# EAGLE board braino_board (EAGLE 7.7.0)
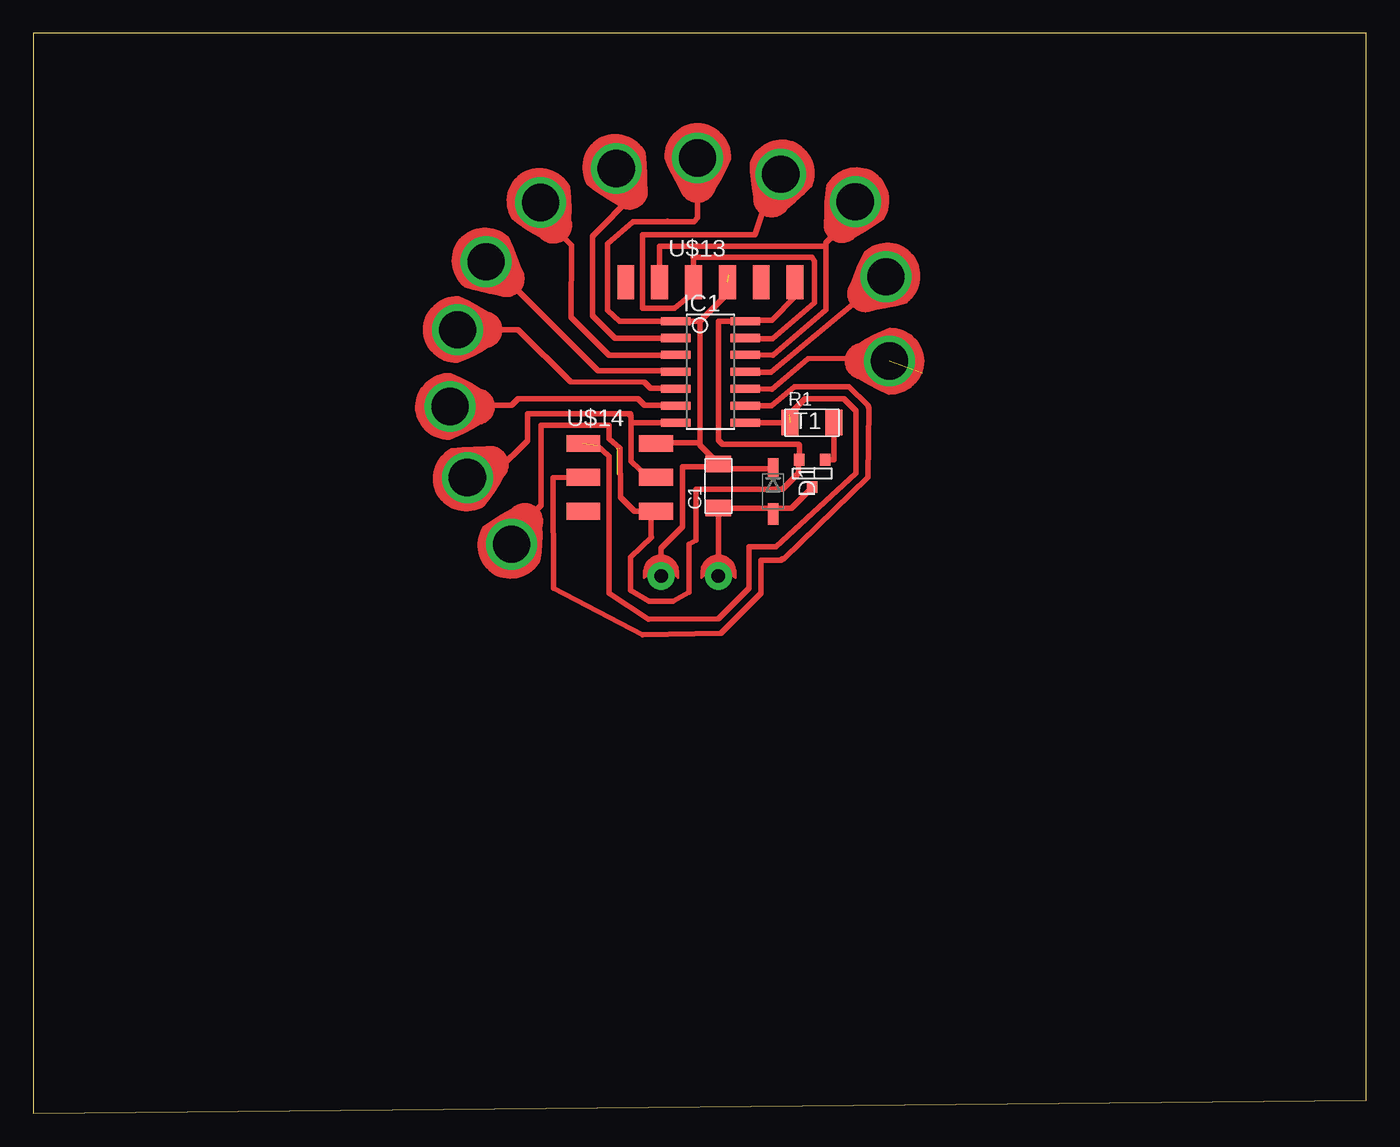
[diagram p0: board, top side]
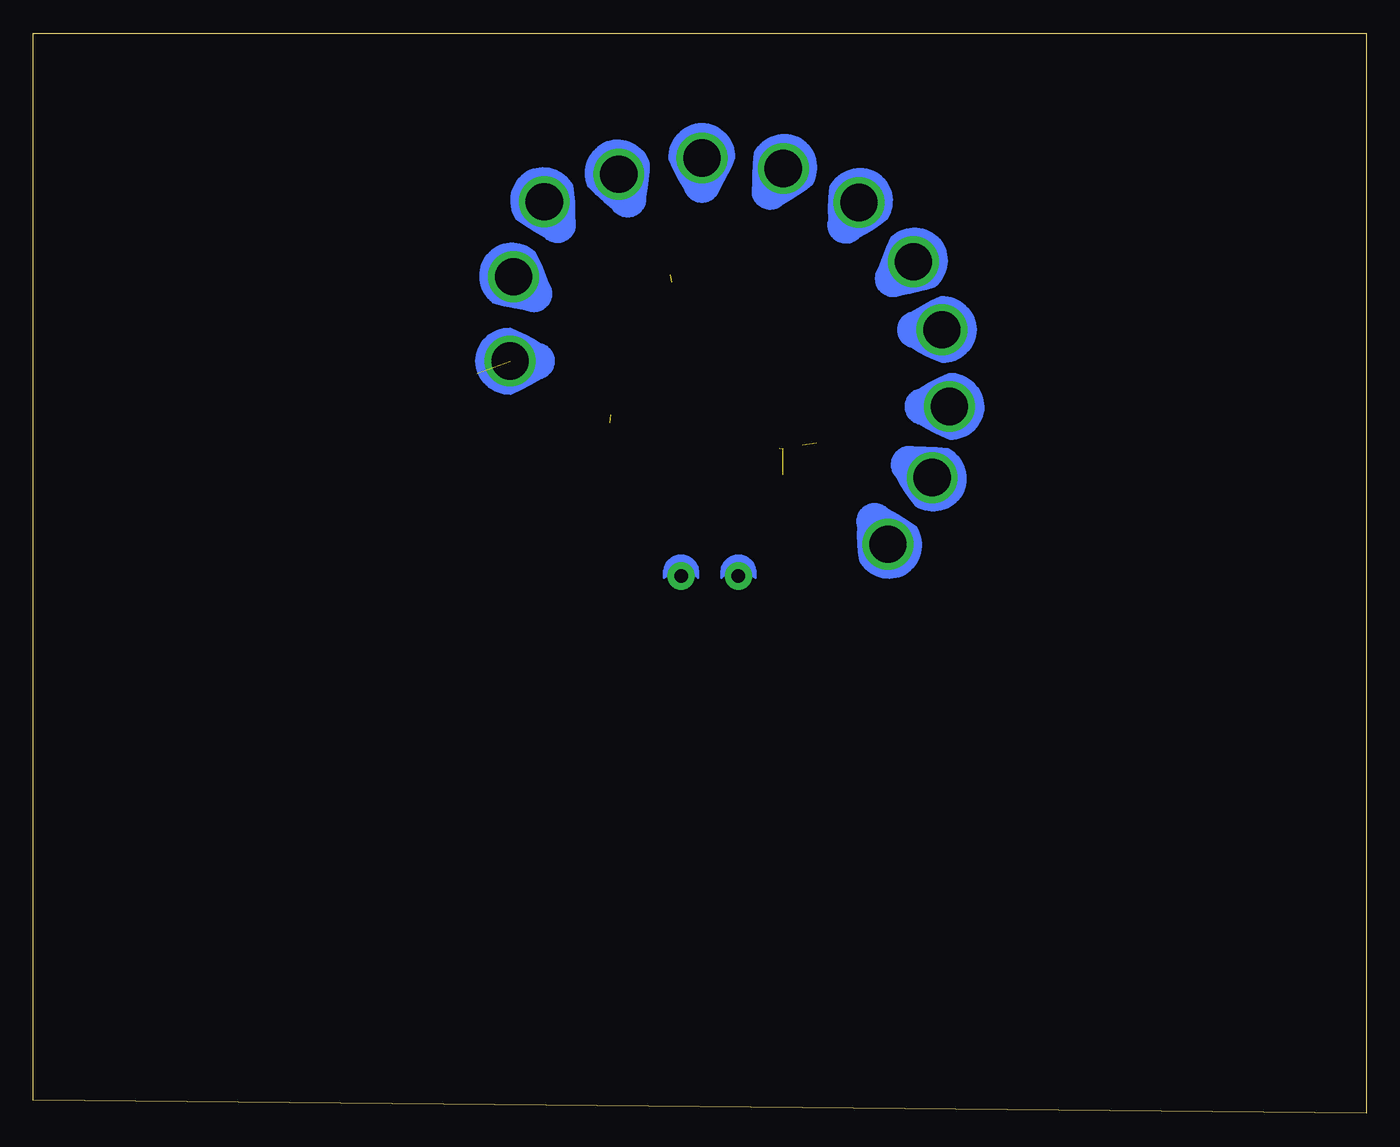
[diagram p1: board, bottom side, seen from below]

Size 100 x 81 mm. Coordinates in mm from the lower left corner, seen from the top.
Outline: 0,0 100,1 100,81 0,81 0,0
Copper layers (1*16): Top 0.035mm / dielectric 1.5mm / Bottom 0.035mm
Design rules "default *": minimum track width 16mil, minimum drill 24mil, track to track 16mil, track to pad 16mil, pad to pad 16mil, via to via 16mil, smd to smd 16mil, copper to edge 40mil, drill to drill 8mil, minimum pad ring 10mil, minimum via ring 8mil, stop-mask expansion 4mil, vias tented up to drill 0mil, thermal gap 10mil

## Footprints (pad centres in the part's own frame; a part is rotated, then mirrored left to right if it is on the bottom)
C1206FAB = smd 1.27 x 1.905: 1 -1.651,0; 2 1.651,0
SOD123 = smd 1.6 x 0.8: ANODE 1.7,0; CATHODE -1.7,0
SOIC14 = smd 0.61 x 2.21: 1 -3.81,-2.603; 2 -2.54,-2.603; 3 -1.27,-2.603; 4 0,-2.603; 5 1.27,-2.603; 6 2.54,-2.603; 7 3.81,-2.603; 8 3.81,2.603; 9 2.54,2.603; 10 1.27,2.603; 11 0,2.603; 12 -1.27,2.603; 13 -2.54,2.603; 14 -3.81,2.603
R1206FAB = smd 1.27 x 1.905: 1 -1.651,0; 2 1.651,0
SOT-23 = smd 0.787 x 0.889: 1 0.025,-1.016; 2 -0.94,1.016; 3 0.991,1.016
PETAL-LONG-2-2SIDE = drill 2.794: 1 0,0
1X06SMD = smd 2.54 x 1.27: 1 0,6.35; 2 0,3.81; 3 0,1.27; 4 0,-1.27; 5 0,-3.81; 6 0,-6.35
2X03SMD = smd 2.54 x 1.27: 1 -2.54,2.54; 2 2.92,2.54; 3 -2.54,0; 4 2.92,0; 5 -2.54,-2.54; 6 2.92,-2.54
PETAL-TINY = drill 1.016 pad 2.032: 1 0,0

## Placement (x,y rotation side)
C1  0.1µF  [C1206FAB]  51.4,47.05 90 top
D1  [SOD123]  55.51,46.65 270 top
IC1  ATTINY44-SSU  [SOIC14]  50.8,55.61 270 top
R1  1k Ω  [R1206FAB]  58.42,51.8 0 top
T1  MOSFET  [SOT-23]  58.42,47.99 0 top
U$1  SEWTAP10  [PETAL-LONG-2-2SIDE]  33.96,63.87 230 top
U$2  SEWTAP10  [PETAL-LONG-2-2SIDE]  31.84,58.77 270 top
U$3  SEWTAP10  [PETAL-LONG-2-2SIDE]  38.05,68.32 210 top
U$4  SEWTAP10  [PETAL-LONG-2-2SIDE]  43.73,70.86 210 top
U$5  SEWTAP10  [PETAL-LONG-2-2SIDE]  31.26,53.01 270 top
U$6  SEWTAP10  [PETAL-LONG-2-2SIDE]  32.57,47.68 300 top
U$9  SEWTAP10  [PETAL-LONG-2-2SIDE]  64.23,56.42 90 top
U$10  SEWTAP10  [PETAL-LONG-2-2SIDE]  63.97,62.74 130 top
U$11  SEWTAP10  [PETAL-LONG-2-2SIDE]  61.67,68.37 150 top
U$12  SEWTAP10  [PETAL-LONG-2-2SIDE]  56.08,70.43 160 top
U$13  FTDI-SMD-HEADER  [1X06SMD]  50.8,62.32 270 top
U$14  AVRISPSMD  [2X03SMD]  43.8,47.7 0 top
U$15  SEWTAP10  [PETAL-LONG-2-2SIDE]  35.88,42.68 330 top
U$16  SEWTAP10  [PETAL-LONG-2-2SIDE]  49.84,71.65 180 top
U$17  SEWTAP11  [PETAL-TINY]  47.1,40.3 0 top
U$18  SEWTAP11  [PETAL-TINY]  51.4,40.3 0 top

## Library data of the parts
C1 D1 IC1 R1 T1 U$13 U$14 = 0_fab
U$1-U$6 U$9-U$12 U$15-U$18 = LilyPad-Wearables

## Nets
GND: IC1.14 T1.2 U$13.1 U$14.6 U$15.1
MOSI: IC1.7 U$6.1 U$14.4
N$1: IC1.4 U$1.1
N$2: IC1.5 U$2.1
N$3: IC1.3 U$3.1
N$4: IC1.2 U$4.1
N$5: IC1.6 U$5.1
N$8: IC1.10 U$9.1
N$9: IC1.11 U$10.1
PA5: IC1.8 R1.1 U$14.1
RX: IC1.12 U$11.1 U$13.5
SCK: IC1.9 U$14.3
TRANS: C1.1 D1.ANODE T1.1 U$18.1
TRANSIN: R1.2 T1.3
TX: IC1.13 U$12.1 U$13.4
VCC: C1.2 D1.CATHODE IC1.1 U$13.3 U$14.2 U$16.1 U$17.1

## Tracks (layer width: path | path; a pad name or v marks a point on that pad's centre or on a via)
GND  (3 unrouted)
  Top 0.406: U$13.1 57.15,61.25 55.4,59.5 53.48,59.5 IC1.14 51.4,59.42 51.4,50.5 51.7,50.2 57.4,50.2 57.48,50.12 T1.2 57.4,48.93 57.4,48 56.2,46.8 49.7,46.8 49.7,43 49.2,42.7 49.2,39.1 48,38.4 46.2,38.4 44.81,39.24 44.79,41.71 46.37,43.21 46.36,43.21 46.36,45.16 U$14.6 45.09,45.16 44.05,46.2 44.01,49.9 43.2,50.6 43.2,51.6 38.1,51.6 38.1,45.6 36.42,43.92 36.42,43.03 36.07,42.68 U$15.1
MOSI
  Top 0.406: IC1.7 44.84,51.8 | 46.3,47.5 U$14.4 46.1,47.7 44.84,48.9 44.84,51.8 | 33.3,46.1 U$6.1 32.57,47.82 32.27,48.12 34.73,48.12 37.07,50.46 37.07,52.44 37.09,52.46 44.82,52.48 44.78,52.32 44.84,52.32 44.84,51.8
N$1
  Top 0.406: IC1.4 48.12,55.69 42.37,55.69 36.06,62 35.83,62 U$1.1 34.67,63.87
N$2
  Top 0.406: IC1.5 48.09,54.45 48.03,54.39 46.32,54.39 45.87,54.84 40.29,54.87 36.37,58.76 36.36,58.77 U$2.1
N$3
  Top 0.406: IC1.3 48.16,56.84 43.19,56.84 40.34,59.69 40.37,65.11 38.05,67.49 | 38.05,66.85 38.05,67.49 | 38.05,67.49 U$3.1
N$4
  Top 0.406: IC1.2 48.19,58.14 43.64,58.14 41.95,59.83 41.95,65.8 45.08,68.93 45.11,68.93 43.73,70.31 U$4.1
N$5
  Top 0.406: IC1.6 48.18,53.09 45.84,53.09 45.35,53.58 36.35,53.58 35.88,53.11 30.7,53.11 30.8,53.01 U$5.1
N$8  (1 unrouted)
  Top 0.406: IC1.10 55.4,54.3 58.1,56.6 63.56,56.62 U$9.1
N$9
  Top 0.406: IC1.11 53.41,55.6 55.36,55.6 U$10.1
PA5  (2 unrouted)
  Top 0.406: R1.1 IC1.8 | 56.7,52.4 57.9,53.6 60.8,53.6 61.7,52.7 61.7,48 55.7,42.5 53.7,42.5 53.7,39.4 51.4,37.1 46.17,37.07 43.2,39 43.2,49.3 42.3,50.1
RX
  Top 0.406: IC1.12 53.42,56.9 55.5,56.87 59.47,60.27 59.47,60.77 59.46,65.02 | 59.46,65.02 46.99,65.05 U$13.5 | U$11.1 61.65,68.39 61.63,68.39 60.09,66.85 60.09,65.94 59.46,65.31 59.46,65.02
SCK
  Top 0.406: IC1.9 55.37,53.07 57.1,54.5 61.2,54.5 62.6,53.1 62.7,52.9 62.6,47.7 56.3,41.6 56.2,41.6 56.1,41.5 54.6,41.5 54.6,39 51.6,36 45.7,35.9 39.03,39.38 38.99,47.68 U$14.3
TRANS
  Top 0.406: 55.51,45.4 C1.1 U$18.1 | 55.51,45.4 D1.ANODE | 55.51,45.4 56.87,45.4 T1.1
TRANSIN
  Top 0.406: T1.3 60.07,49.01 R1.2
TX
  Top 0.406: IC1.13 53.45,58.1 55.46,58.11 58.6,60.8 58.6,63.9 58.4,64.2 49.5,64.2 49.53,64.07 U$13.4 49.7,62.03 49.7,61.7 48.1,60.38 45.71,60.38 45.7,60.9 45.7,65.9 54.14,65.9 54.16,65.88 55.57,70.16 | 54.42,69.54 55.57,70.16 | 55.57,70.16 U$12.1
VCC  (1 unrouted)
  Top 0.406: 50,59.4 48.2,59.4 IC1.1 48.18,59.4 43.97,59.4 43.07,60.24 43.07,65.22 45,66.88 47.57,66.88 47.58,66.89 47.59,66.88 49.55,66.88 49.84,67.17 U$16.1 | C1.2 51.75,48.35 D1.CATHODE | 50,59.4 50,50.3 | 50,50.3 50,50.1 C1.2 | U$17.1 47.1,42.4 48.7,44 48.7,48.5 51.2,48.5 C1.2 | U$14.2 46.86,49.9 47.3,49.9 47.7,50.3 50,50.3 | 52.2,62.9 52.2,61.6 50,59.4